# Altium PCB STM32_QFP100_DEVELOPMENT_BOARD.PcbDoc
Units mil, origin at the board's own origin, x right, y up, seen from the top; angles counter-clockwise.
Board outline 4600 x 2750 mil, 2 copper layers (Top Layer, Bottom Layer); 53 components, 105 nets, 334 pads, 20 vias.
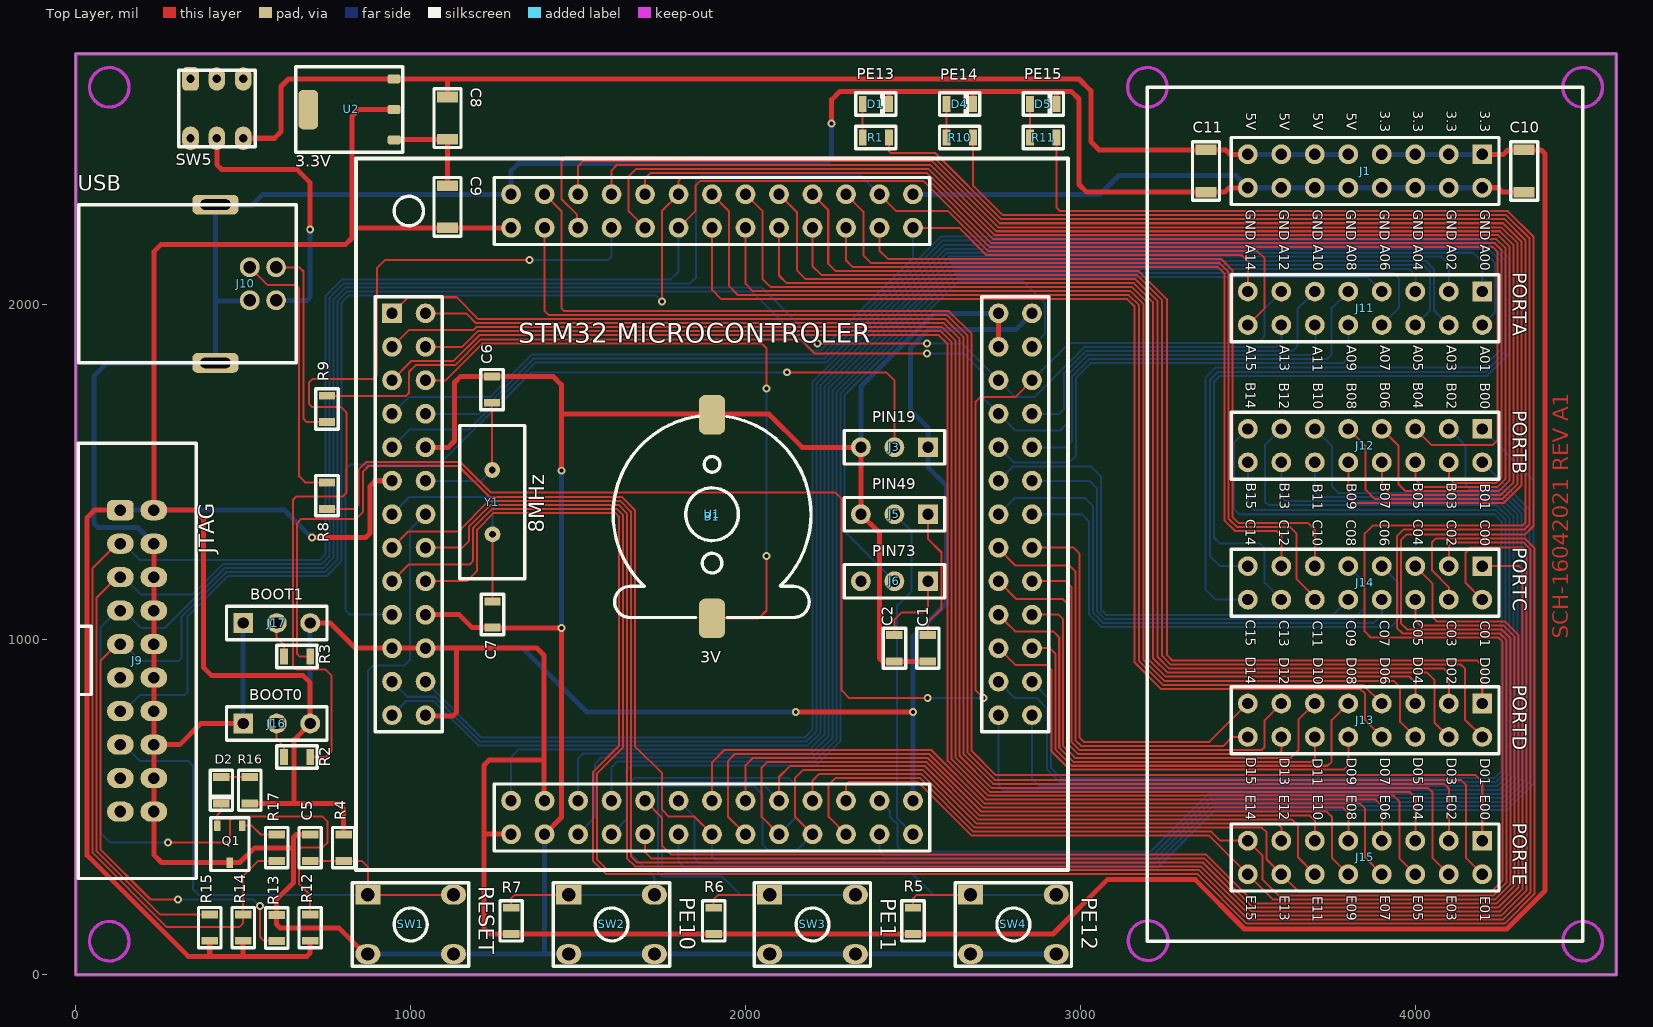
[diagram p0: Top Layer view]
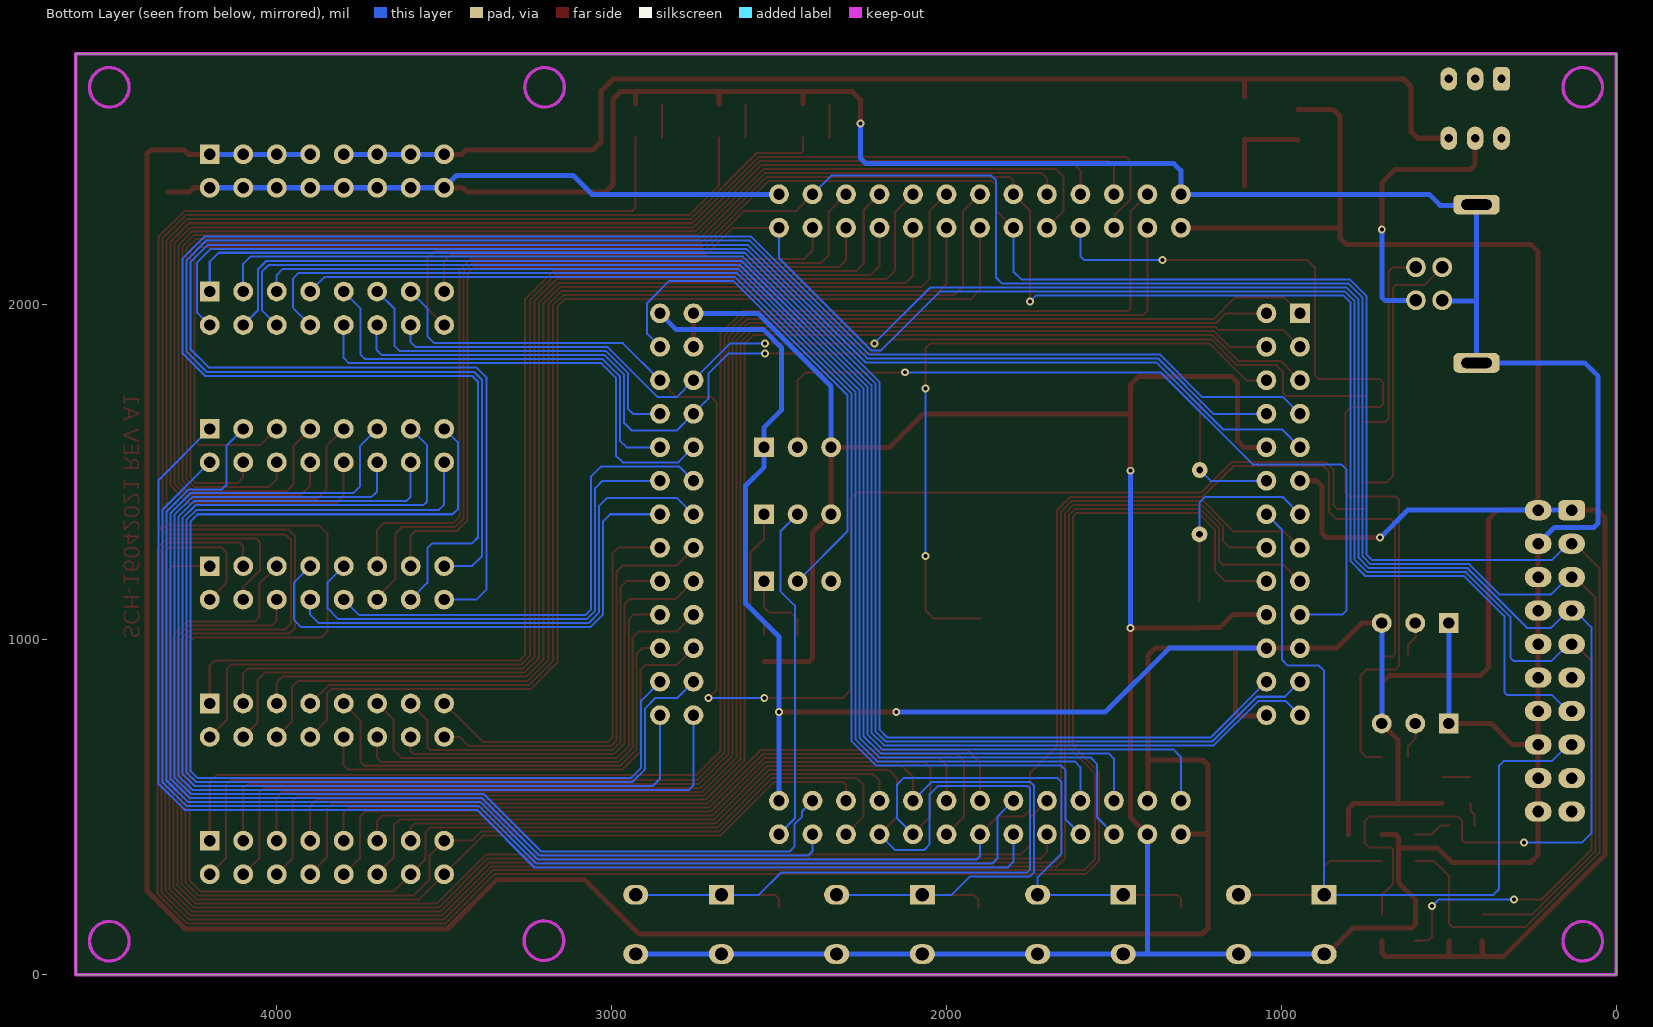
[diagram p1: Bottom Layer view, seen from below]

## Layer stack, top to bottom
Top Solder: solder mask 0.4, Solder Resist, Dk 3.5
Top Layer: signal copper 1.4
Dielectric 1: dielectric 12.6, FR-4, Dk 4.8
Bottom Layer: signal copper 1.4
Bottom Solder: solder mask 0.4, Solder Resist, Dk 3.5

## Board outline
0,0 4600,0 4600,2750 0,2750

## Design rules (kind name [scope] priority, off if disabled: settings)
Clearance [All] p1: gap=5.91 ignorepadtopadclearanceinfootprint=FALSE
PolygonConnect [All] p1: connectstyle=Relief reliefconductorwidth=10 reliefentries=4 polygonreliefangle="90 Angle" airgapwidth=10
RoutingPriority [OnLayer('Top Layer')] p1: routingpriority=0
RoutingVias [All] p1: holewidth=11.81 width=23.62 viastyle="Through Hole" minholewidth=11.81 minwidth=23.62 maxholewidth=11.81 maxwidth=23.62
SolderMaskExpansion [All] p1: expansion=4 istentingtop=FALSE
UnRoutedNet [All] p1: checkbadconnections=TRUE
Width [All] p1: maxlimit=15 minlimit=6 preferedwidth=6
28 further rules are at their usual default settings.

## Components (designator, comment, footprint, x,y, rotation, side; value= is the part's Value field where it differs from the comment)
B1 "3V" CR1220 1900,1375 r0 top
C1 "102pF" C0805 2544.48,974.99 r90 top
C2 "102pF" C0805 2444.48,974.99 r90 top
C5 "104P" C0805 699.99,379.38 r270 top
C6 "22p" C0805 1242.99,1747.38 r270 top
C7 "22p" C0805 1244.49,1075.62 r90 top
C8 "102pF" C1206 1110,2557.99 r90 top
C9 "102pF" C1206 1110,2292.99 r270 top
C10 "102pF" C1206 4325,2400 r90 top
C11 "102pF" C1206 3375,2400 r90 top
D1 "PE13" L0805RED 2389.37,2575.4 r0 top
D2 "LED0805" L0805RED 409.88,550.64 r270 top
D4 "PE14" L0805RED 2639.37,2575.4 r0 top
D5 "PE15" L0805RED 2889.37,2575.4 r0 top
J1 "POWER" "Header 8x2 TH Pitch 2.54mm" 3850,2400 r270 top
J3 "PIN19" "Header 3x1 TH Pitch 2.54mm" 2444.48,1574.99 r180 top
J5 "PIN49" "Header 3x1 TH Pitch 2.54mm" 2444.48,1374.99 r180 top
J6 "PIN73" "Header 3x1 TH Pitch 2.54mm" 2444.48,1174.99 r180 top
J9 "JTAG" IDC_CONNECTOR_20_2.54 183,937 r0 top
J10 "USB" USB-B-TYPE 558.73,2063.22 r0 top
J11 "PORTA" "Header 8x2 TH Pitch 2.54mm" 3850,1990.01 r270 top
J12 "PORTB" "Header 8x2 TH Pitch 2.54mm" 3850,1580 r270 top
J13 "PORTD" "Header 8x2 TH Pitch 2.54mm" 3850,760.01 r270 top
J14 "PORTC" "Header 8x2 TH Pitch 2.54mm" 3850,1170.01 r270 top
J15 "PORTE" "Header 8x2 TH Pitch 2.54mm" 3850,350 r270 top
J16 "BOOT0" "Header 3x1 TH Pitch 2.54mm" 600,750 r0 top
J17 "BOOT1" "Header 3x1 TH Pitch 2.54mm" 600,1050 r0 top
Q1 "2N3906" SOT23-3 460,390.01 r180 top
R1 "10k" R0805 2428.74,2500 r0 top
R2 "10k" R0805 700,650 r0 top
R3 "10k" R0805 700,950 r0 top
R4 "4K7" R0805 800,340 r270 top
R5 "4K7" R0805 2500,200 r90 top
R6 "4K7" R0805 1905,200 r90 top
R7 "4K7" R0805 1300,200 r90 top
R8 "4K7" R0805 750,1391.26 r270 top
R9 "4K7" R0805 750,1728.74 r90 top
R10 "10k" R0805 2678.74,2500 r0 top
R11 "10k" R0805 2928.74,2500 r0 top
R12 "10k" R0805 700,101.26 r270 top
R13 "10k" R0805 600,100 r270 top
R14 "10k" R0805 500,101.26 r270 top
R15 "10k" R0805 400,101.26 r270 top
R16 "1K" R0805 519.49,511.27 r270 top
R17 "4K7" R0805 600,340 r270 top
SW1 "RESET" BUTTON_HOLE_5.0mm 1000,150 r90 top
SW2 "PE10" BUTTON_HOLE_5.0mm 1600,150 r90 top
SW3 "PE11" BUTTON_HOLE_5.0mm 2200,150 r90 top
SW4 "PE12" BUTTON_HOLE_5.0mm 2800,150 r90 top
SW5 "SWITCH" "SWITCH 5.8x5.8 6 PINS" 421.26,2586.42 r0 top
U1 "STM32 MICROCONTROLER" SOCKET-ADAPTER-OTQ-100-05-12 1900,1375 r90 top
U2 "3.3V" SOT223-3 814.17,2583.46 r90 top
Y1 "8MHz" HC-49S 1243.48,1314.99 r90 top

## Footprints (in the part's own frame and the unit in brackets; to place one, negate y for a bottom-side part, rotate by r counter-clockwise, add the part's x,y. Pads: shape width x height; smd on the part's side, far side on the other; paste and mask are expansions set on the pad)
BUTTON_HOLE_5.0mm [mm]
  rect 1.5x1.9 hole 1: 1(2.25,3.25)
  oval 1.5x1.9 hole 1: 2(2.25,-3.25) 3(-2.25,3.25) 4(-2.25,-3.25)
  silkscreen extent -3.18,-4.4 3.18,4.42, body extent -3,-3.86 3,3.86, height 5
C0805 [mm]
  rect 0.6x1.24 smd: 1(-1,0) 2(1,0)
  silkscreen extent -1.52,-0.85 1.53,0.85, body extent -1,-0.6 1,0.6, height 1
C1206 [mm]
  rect 0.8x1.6 smd: 1(-1.6,0) 2(1.6,0)
  silkscreen extent -2.23,-1.02 2.22,1.02, body extent -1.6,-0.8 1.6,0.8, height 0.75
CR1220 [mm]
  rrect50% 2x3 smd: 1(0,-7.9) 2(0,7.55)
  silkscreen extent -7.5,-7.84 7.5,7.43, body extent -7.5,-9.42 7.5,9.07, height 4.04
HC-49S [mm]
  round 1.2 hole 0.5: 1(0,-0.025) 2(4.88,0)
  silkscreen extent -3.37,-2.47 8.25,2.45, body extent -3.24,-2.33 8.11,2.32, height 3.5
"Header 3x1 TH Pitch 2.54mm" [mm]
  rect 1.5x1.5 hole 0.85: 1(-2.54,0)
  round 1.5 hole 0.85: 2(0,0) 3(2.54,0)
  silkscreen extent -3.81,-1.27 3.81,1.27, body extent -3.81,-1.27 3.81,1.27, height 8.89
"Header 8x2 TH Pitch 2.54mm" [mm]
  rect 1.5x1.5 hole 0.85: 1(-1.27,8.89)
  round 1.5 hole 0.85: 2(1.27,8.89) 3(-1.27,6.35) 4(1.27,6.35) 5(-1.27,3.81) 6(1.27,3.81) 7(-1.27,1.27) 8(1.27,1.27) 9(-1.27,-1.27) 10(1.27,-1.27) 11(-1.27,-3.81) 12(1.27,-3.81) 13(-1.27,-6.35) 14(1.27,-6.35) 15(-1.27,-8.89) 16(1.27,-8.89)
  silkscreen extent -2.54,-10.16 2.54,10.16, body extent -2.54,-10.16 2.54,10.16, height 8.89
IDC_CONNECTOR_20_2.54 [mil]
  rrect50% 80x60 hole 35: 1(-50,450)
  oval 80x60 hole 35: 2(50,450) 3(-50,350) 4(50,350) 5(-50,250) 6(50,250) 7(-50,150) 8(50,150) 9(-50,50) 10(50,50) 11(-50,-50) 12(50,-50) 13(-50,-150) 14(50,-150) 15(-50,-250) 16(50,-250) 17(-50,-350) 18(50,-350) 19(-50,-450) 20(50,-450)
  silkscreen extent -175,-650 177,650, body extent -176,-654 174,654, height 354
L0805RED [mm]
  rect 0.6x1.24 smd: 1(-1,0.625) 2(1,0.625)
  silkscreen extent -1.53,-0.23 1.52,1.47, body extent -1,0 1,1.25, height 1.1
R0805 [mm]
  rect 0.6x1.24 smd: 1(-2,0) 2(0,0)
  silkscreen extent -2.53,-0.85 0.53,0.85, body extent -2,-0.62 0,0.62, height 0.45
SOCKET-ADAPTER-OTQ-100-05-12 [mm]
  rect 1.5x1.5 hole 0.85: 1(15.24,24.27)
  round 1.5 hole 0.85: 2(15.24,21.73) 3(12.7,24.27) 4(12.7,21.73) 5(10.16,24.27) 6(10.16,21.73) 7(7.62,24.27) 8(7.62,21.73) 9(5.08,24.27) 10(5.08,21.73) 11(2.54,24.27) 12(2.54,21.73) 13(0,24.27) 14(0,21.73) 15(-2.54,24.27) 16(-2.54,21.73) 17(-5.08,24.27) 18(-5.08,21.73) 19(-7.62,24.27) 20(-7.62,21.73) 21(-10.16,24.27) 22(-10.16,21.73) 23(-12.7,24.27) 24(-12.7,21.73) 25(-15.24,24.27) 26(-21.73,15.24) 27(-24.27,12.7) 28(-21.73,12.7) 29(-24.27,10.16) 30(-21.73,10.16) 31(-24.27,7.62) 32(-21.73,7.62) 33(-24.27,5.08) 34(-21.73,5.08) 35(-24.27,2.54) 36(-21.73,2.54) 37(-24.27,0) 38(-21.73,0) 39(-24.27,-2.54) 40(-21.73,-2.54) 41(-24.27,-5.08) 42(-21.73,-5.08) 43(-24.27,-7.62) 44(-21.73,-7.62) 45(-24.27,-10.16) 46(-21.73,-10.16) 47(-24.27,-12.7) 48(-21.73,-12.7) 49(-24.27,-15.24) 50(-21.73,-15.24) 51(-15.24,-24.27) 52(-15.24,-21.73) 53(-12.7,-24.27) 54(-12.7,-21.73) 55(-10.16,-24.27) 56(-10.16,-21.73) 57(-7.62,-24.27) 58(-7.62,-21.73) 59(-5.08,-24.27) 60(-5.08,-21.73) 61(-2.54,-24.27) 62(-2.54,-21.73) 63(0,-24.27) 64(0,-21.73) 65(2.54,-24.27) 66(2.54,-21.73) 67(5.08,-24.27) 68(5.08,-21.73) 69(7.62,-24.27) 70(7.62,-21.73) 71(10.16,-24.27) 72(10.16,-21.73) 73(12.7,-24.27) 74(12.7,-21.73) 75(15.24,-24.27) 76(21.73,-15.24) 77(24.27,-12.7) 78(21.73,-12.7) 79(24.27,-10.16) 80(21.73,-10.16) 81(24.27,-7.62) 82(21.73,-7.62) 83(24.27,-5.08) 84(21.73,-5.08) 85(24.27,-2.54) 86(21.73,-2.54) 87(24.27,0) 88(21.73,0) 89(24.27,2.54) 90(21.73,2.54) 91(24.27,5.08) 92(21.73,5.08) 93(24.27,7.62) 94(21.73,7.62) 95(24.27,10.16) 96(21.73,10.16) 97(24.27,12.7) 98(21.73,12.7) 99(24.27,15.24) 100(21.73,15.24) 101(-15.24,21.73) 102(-24.27,15.24) 103(15.24,-21.73) 104(24.27,-15.24)
  silkscreen extent -27,-27 27,27, body extent -25.54,-25.54 25.54,25.54, height 8.89
SOT23-3 [mm]
  rect 0.5x0.8 smd: 1(-0.95,-1.4) 2(0.95,-1.4) 3(0,1.4)
  silkscreen extent -1.45,-2 1.45,2, body extent -1.45,-1.4 1.45,1.4, height 1.3
SOT223-3 [mm]
  rrect50% 0.7x1 smd: 1(-2.3,-3.475) 2(0,-3.45) 3(2.325,-3.45)
  rrect50% 3x1.5 smd: 4(0,3.048)
  silkscreen extent -3.25,-4.11 3.25,3.99, body extent -3.25,-3.5 3.25,3.5, height 1.7
"SWITCH 5.8x5.8 6 PINS" [mm]
  rrect50% 1.27x1.778 hole 0.635: 1(-2,2.25)
  oval 1.27x1.778 hole 0.635: 2(0,2.25) 3(2,2.25) 4(2,-2.25) 5(0,-2.25) 6(-2,-2.25)
  silkscreen extent -2.9,-2.9 2.9,2.9, body extent -2.9,-2.9 2.9,2.9, height 10
USB-B-TYPE [mm]
  round 1.5 hole 0.95: 1(1,-1.25) 2(1,1.25) 3(-1,1.25) 4(-1,-1.25)
  rrect50% 3.5x1.5 hole 0.8 slot 2.3 at 0 deg: S1(-3.6,6) S2(-3.6,-6)
  silkscreen extent -13.97,-6 2.53,6, body extent -13.97,-7.42 2.53,7.37, height 11

## Part data
B1: library part Batery
C1 C2 C8 C9 C10 C11: library part Capacitors(SMD)
C5 C6 C7: library part C0805
D1 D4 D5: library part LED0805
J1 J11 J12 J13 J14 J15: library part "Header 8x2 TH Pitch 2.54mm"
J3 J5 J6 J16 J17: library part "Header 3x1 TH Pitch 2.54mm"
J9: library part IDC_2.54_10x2
J10: library part "USB B Type"
Q1: library part "2N3906 (SOT-23)"
R1 R2 R3 R4 R5 R6 R7 R8 R9 R10 R11 R16 R17: library part "Resistor SMD"
R12 R13 R14 R15: library part Resistors-SMD
SW1 SW2 SW3 SW4: library part "Button Hole"
SW5: library part SWITCH-DPDT
U1: library part SOCKET-ADAPTER-OTQ-100-05-12
U2: library part Ic-AMS1117(SOT-223)
Y1: library part Crystal

## Via types
v1: diameter 23.62, hole 11.81, Top Layer to Bottom Layer, tented both sides, 20 vias

## Nets (pads, with @x,y where several pads share a name; then routed paths per layer and width w, separated by ;. In a path a pad name is that pad's centre, name@x,y a point inside that pad or via, vN(x,y) a via of type N, cw(c..) or ccw(c..) an arc to the next point about the centre after c; other vN are vias at no path point)
+5: C8.2 C11.2 J1.9 J1.11 J1.13 J1.15 SW5.4 U2.3 | length 3688.7
  Top Layer w15: SW5.4 592.83,2497.83 612.5,2517.5 612.5,2652.5 635,2675 U2.3 1110,2675 ; C8.2 1110,2675 ; J1.15 3447,2450 3434,2463 3056,2463 3031,2488 3031,2640 2996,2675 1110,2675
  Bottom Layer w15: J1.15 J1.13 J1.11 J1.9
BOOT0: R2.2 U1.94 | length 2846.7
  Top Layer w6: R2.2 747,650 763,666 763,894 745.1,911.9 659.1,911.9 649,922 649,1419 658,1428 797,1428 808,1439 808,1679.5 792.5,1695 706,1695 696,1705 696,1768 707,1779 889,1779 900,1790 900,2111 923,2134 v1(1355,2134)
  Bottom Layer w6: v1(1355,2134) 1588,2134 1600,2146 U1.94
GND: B1.2 C1.1 C2.1 C5.1 C6.1 C7.1 C10.1 C11.1 D1.2 D4.2 D5.2 J1.2 J1.4 J1.6 J1.8 J1.10 J1.12 J1.14 J1.16 J3.3 J5.3 J9.4 J9.6 J9.8 J9.10 J9.12 J9.14 J9.16 J9.18 J9.20 J10.4 J10.S1 J10.S2 J16.1 J17.1 Q1.3 R13.1 SW1.3 SW1.4 SW2.3 SW2.4 SW3.3 SW3.4 SW4.3 SW4.4 U1.10 U1.20 U1.27 U1.74 U1.99 U1.103 U1.104 | length 17175.2
  Top Layer w15: J9.4 J9.6 J9.8 J9.10 J9.12 J9.14 J9.16 ; J16.1 373,750 310,687 J9.16 ; 649.7,379 534,379 489.89,334.89 Q1.3 256.11,334.89 233,358 J9.20 J9.18 J9.16 ; C5.1 658.79,418.74 650,409.95 650,275 600,225 R13.1 600,150 611,139 786.59,139 864.17,61.42 SW1.3 ; U1.20 1145,1075 1183.75,1036.25 C7.1 1245.11,1035.63 1449.37,1035.63 v1(1450,1035) 1450,469.49 U1.27 ; U1.10 1112.5,1575 1131,1593.5 1131,1768.5 1149.24,1786.74 C6.1 1425,1786.74 1450,1761.74 1450,1675 ; SW1.4@1120.08,61.42 SW1.4 ; v1(1450,1505) 1450,1675 ; v1(2257,2542) 2257,2613.08 2282,2638.08 2427,2638.08 ; D1.2 2428.74,2636.34 2427,2638.08 ; C1.1 C2.1 2408.37,935.63 2400,944 2400,1319.48 J5.3 J3.3 2169.01,1574.99 2070,1674 1900,1674 1451,1674 1450,1675 ; D4.2 2678.74,2637.28 2679.54,2638.08 ; U1.74 U1.103 ; D5.2 2928.74,2634.34 ; J1.16 3499.76,2349.76 3443.75,2349.76 3431,2337.01 C11.1 3018.99,2337.01 2996,2360 2996,2615 2972.92,2638.08 2679.54,2638.08 ; J1.2 4247.99,2350.01 4260.99,2337.01 C10.1 ; 2427,2638.08 2679.54,2638.08
  Bottom Layer w15: J9.4 184.01,1336 66,1336 54,1348 54,1787 94,1827 J10.S2 J10.S1 ; 418,2012.01 J10.4@527.36,2012.01 ; J10.S1@430.31,2292.13 425,2297.44 525.44,2297.44 558.51,2330.51 U1.99 1300.01,2401.01 1321,2422 2240,2422 2257,2439 v1(2257,2542) ; J16.1 J17.1 ; SW1.3 SW1.4 1400,61.42 ; U1.27 1400,61.42 ; v1(1450,1035) v1(1450,1505) ; J3.3 2344.48,1756.48 2562.99,1974.99 U1.103 ; U1.104 3058.52,2330.52 3115,2387 3463,2387 J1.16 J1.2 ; SW4.4 SW4.3 SW3.4 SW3.3 SW2.4 SW2.3 1400,61.42
JNRST: J9.3 J12.5 R14.1 R17.2 U1.90 | length 7865.4
  Top Layer w6: J9.3 123,1287 50.5,1214.5 50.5,363.5 272,142 488,142 500,154 R14.1 500,295 545,340 R17.2 ; U1.90 1851,2281.51 1851,2356.25 1865.32,2370.57 2531.27,2370.57 2729.36,2172.47 4232.53,2172.47 4245,2160 4245,1595 4232,1582 4048,1582 J12.5
  Bottom Layer w6: J9.3 143,1287 192.01,1238 729,1238 745.47,1254.47 745.47,2025.82 795.84,2076.19 1776.19,2076.19 1800,2100 U1.90
JTCK: J9.9 J11.15 R13.2 U1.76 | length 6128.3
  Top Layer w6: J9.9 123,987 74.31,938.31 74.31,373.36 223.15,224.52 v1(305,224.52) ; v1(550,205) 550,113.54 561.77,101.77 598.23,101.77 R13.2 R13.2@587.4,100 ; U1.76 2637.65,2230.52 2719.5,2148.66 3482.34,2148.66 3500,2131 J11.15
  Bottom Layer w6: J9.9 143,987 193.01,937 307,937 316.09,946.09 316.09,1069.42 448.96,1202.28 743.79,1202.28 781.19,1239.68 781.19,2011.03 810.64,2040.47 2018.81,2040.47 2195,1864.28 2225.28,1864.28 2499.99,2138.99 U1.76 ; v1(305,224.52) 530.48,224.52 v1(550,205)
JTDI: J9.5 J11.16 R15.1 U1.77 | length 6168.9
  Top Layer w6: J9.5 123,1187 62.41,1126.41 62.41,368.43 250.84,180 R15.1 ; U1.77 2450.51,2280 2605,2280 2724.43,2160.57 3528.43,2160.57 3550,2139 3550,1990.01 J11.16
  Bottom Layer w6: J9.5 143,1187 194.01,1136 349,1136 439.09,1226.09 733.93,1226.09 757.38,1249.54 757.38,1963.89 757.38,2020.89 800.77,2064.28 857.77,2064.28 1834.28,2064.28 1852,2082 1852,2372 1866,2386 2344.51,2386 U1.77
JTDO: J9.13 J12.4 U1.89 | length 6553.5
  Top Layer w6: v1(1750,2010) 1750,2280.51 U1.89 1800,2371 1811.47,2382.47 2536.2,2382.47 2734.3,2184.38 4237.46,2184.38 4257.76,2164.08 4257.76,1485.92 4239.93,1468.09 4116.91,1468.09 4100,1485 J12.4
  Bottom Layer w6: J9.13 143,787 191,835 325,835 334,844 334,1070.49 453.89,1190.38 748.73,1190.38 793.09,1234.75 793.09,2006.09 815.57,2028.57 1731.43,2028.57 v1(1750,2010)
JTMS: J9.7 J11.14 R12.1 U1.72 | length 6436.1
  Top Layer w6: v1(275,395) 453,395 461,403 461,461 473,473 736,473 751,458 751,394 737,380 673.91,380 666.41,372.5 666.41,271.59 700,238 R12.1 ; v1(2215,1885) v1(2542.3,1885)
  Bottom Layer w6: v1(275,395) 102,395 73.49,423.51 73.49,428.49 74,429 74,1038 123,1087 J9.7 143,1087 195.01,1035 264.84,1035 444.03,1214.19 738.86,1214.19 769.28,1244.61 769.28,1958.96 769.28,2015.96 805.7,2052.38 862.7,2052.38 2047.62,2052.38 v1(2215,1885) ; v1(2542.3,1885) 2645.51,1885 U1.72 2805.51,1725 2862,1725 3011.09,1874.09 3585.09,1874.09 3600,1889 J11.14
NetB1_1: B1.1 U1.6 | length 2022.6
  Top Layer w6: U1.6 1104.35,1775 1214.63,1885.28 2047.72,1885.28 2062.5,1870.5 v1(2062.5,1750) ; B1.1 2038.98,1063.98 2062.5,1087.5 v1(2062.5,1250)
  Bottom Layer w6: v1@2062.5,1252.5 v1(2062.5,1750)
NetC1_2: C1.2 J5.1 | length 394.4
  Top Layer w6: C1.2 2544.47,1052.47 2585.19,1093.19 2585.19,1260.81 2544.48,1301.52 J5.1
NetC2_2: C2.2 J6.1 | length 239.5
  Top Layer w6: C2.2 2444.47,1060.47 2466,1082 2530,1082 2544.48,1096.48 J6.1
NetC8_1: C8.1 C9.1 U2.1 | length 298.5
  Top Layer w15: U2.1 952.03,2493.96 C8.1@1110,2493.96 ; C9.1 C8.1@1110,2493.96 ; C8.1 C8.1@1110,2493.96
NetD1_1: D1.1 R1.1 | length 100
  Top Layer w6: R1.1 D1.1
NetD2_1: D2.1 R16.1 | length 85
  Top Layer w6: D2.1 R16.1
NetD2_2: D2.2 Q1.2 | length 71.1
  Top Layer w6: Q1.2 422.6,476.88 434.49,488.76 D2.2
NetD4_1: D4.1 R10.1 | length 100
  Top Layer w6: R10.1 D4.1
NetD5_1: D5.1 R11.1 | length 100
  Top Layer w6: R11.1 D5.1
NetJ10_1: J10.1 SW5.5 | length 827.7
  Top Layer w15: SW5.5 421.26,2418.74 435,2405 660,2405 700,2365 v1(700,2225)
  Bottom Layer w15: J10.1 691.01,2014.01 700,2023 v1(700,2225)
NetJ10_2: J10.2 R9.1 | length 601.2
  Top Layer w6: J10.2 667.57,2112.43 680,2100 680,1660 690,1650 R9.1
NetJ10_3: J10.3 R8.1 | length 826
  Top Layer w6: J10.3 571.8,2060 657.16,2060 667.16,2050 667.16,1487.84 685,1470 R8.1
NetJ16_2: J16.2 R2.1 | length 108.8
  Top Layer w6: J16.2 600,704 621.26,682.74 R2.1
NetJ17_2: J17.2 R3.1 | length 108.8
  Top Layer w6: J17.2 600,1007 621.26,985.74 R3.1
NetQ1_1: Q1.1 R17.1 | length 113.5
  Top Layer w6: Q1.1 525.87,445.13 552.26,418.74 R17.1
nRST: C5.2 J9.15 R4.2 SW1.1 SW1.2 U1.14 | length 2921.7
  Top Layer w6: C5.2 R4.2 854,340 872.05,321.95 SW1.1 SW1.2
  Bottom Layer w6: J9.15 143,687 192.01,638 336,638 350,624 350,255.58 367,238.58 SW1.1 872.05,907.05 889,924 982,924 998,940 998,1328.51 U1.14
OSC0: C6.2 U1.12 Y1.2 | length 413.4
  Top Layer w6: C6.2 1243.48,1707.52 Y1.2
  Bottom Layer w6: U1.12 1211.36,1475 Y1.2
OSC1: C7.2 U1.13 Y1.1 | length 623.3
  Top Layer w6: C7.2 Y1.1
  Bottom Layer w6: U1.13 996.49,1427 1227,1427 1244.48,1409.52 Y1.1
PA0: J11.1 U1.23 | length 4642.2
  Bottom Layer w6: U1.23 989.51,830 1072.67,830 1206.24,696.43 2181.41,696.43 2212.57,727.59 2212.57,1765.63 2602.85,2155.91 4173.09,2155.91 4199.99,2129.01 J11.1
PA1: J11.2 U1.24 | length 4695.1
  Bottom Layer w6: U1.24 1211.17,708.34 2176.48,708.34 2200.66,732.52 2200.66,1770.56 2597.91,2167.81 4197.19,2167.81 4238.43,2126.57 4238.43,1978.45 J11.2
PA2: J11.3 U1.25 | length 4532.9
  Bottom Layer w6: U1.25 987.48,818 1067.83,818 1201.3,684.53 2186.34,684.53 2224.47,722.66 2224.47,1760.69 2607.78,2144 4079,2144 4100,2123 J11.3
PA3: J11.4 U1.26 | length 4303.4
  Bottom Layer w6: U1.26 1300.01,650.01 1322.62,672.62 2191.27,672.62 2236.38,717.73 2236.38,1755.76 2611.9,2131.28 4031.72,2131.28 4056,2107 4056,1984.01 J11.4
PA4: J11.5 U1.29 | length 3957.3
  Bottom Layer w6: U1.29 1550,469.49 1550,629 1569.81,648.81 2201.14,648.81 2260.19,707.86 2260.19,1745.9 2621.76,2107.47 3981.53,2107.47 4000,2089 J11.5
PA5: J11.6 U1.30 | length 4074
  Bottom Layer w6: U1.30 1500,645 1515.72,660.72 2196.21,660.72 2248.28,712.79 2248.28,1750.83 2616.83,2119.38 4023.62,2119.38 4044.09,2098.91 4044.09,1984.1 J11.6
PA6: J11.7 U1.31 | length 3701.3
  Bottom Layer w6: U1.31 1644,463.49 1644,610 1659,625 2211,625 2284,698 2284,876.14 2284,1130.14 2284,1736.04 2631.62,2083.66 3856.34,2083.66 J11.7
PA7: J11.8 U1.32 | length 3838.6
  Bottom Layer w6: U1.32 1600,620 1616.91,636.91 2206.07,636.91 2272.09,702.93 2272.09,1740.97 2626.69,2095.57 3934.43,2095.57 3952,2078 3952,1992.01 J11.8
PA8: J11.9 U1.67 | length 1330.1
  Bottom Layer w6: U1.67 2955,1575 2975.09,1595.09 2975.09,1787.58 3025.89,1838.38 3735.38,1838.38 3750,1853 3750,1990.01 J11.9
PA9: J11.10 U1.68 | length 1426.7
  Bottom Layer w6: U1.68 2800.51,1530 2967,1530 2987,1550 2987,1782.65 3030.82,1826.47 3784.47,1826.47 3800,1842 J11.10
PA10: J11.11 U1.69 | length 1123.5
  Bottom Layer w6: U1.69 2936,1675 2951.28,1690.28 2951.28,1797.45 3016.03,1862.19 3633.19,1862.19 3648,1877 3648,1988.01 J11.11
PA11: J11.12 R9.2 U1.70 | length 3474.2
  Top Layer w6: R9.2 986.74,1728.74 995,1737 995,1800 1015,1820 1132.51,1820 1209.7,1897.19 2164.81,1897.19 2207,1855 2541.52,1855 v1(2541.99,1855.47)
  Bottom Layer w6: v1(2541.99,1855.47) 2649.53,1855.47 2711,1794 2711,1719.51 U1.70 2805.51,1625 2939.19,1625 2963.19,1649 2963.19,1792.52 3020.96,1850.28 3686.28,1850.28 3702,1866 3702,1938.01 J11.12
PA12: J11.13 R8.2 U1.71 | length 4699.4
  Top Layer w6: R8.2 833,1391.26 844,1402.26 844,1508 867,1531 1147.84,1531 1238.84,1440 2268,1440 2287,1421 2287,849 2310,826 v1(2544,826) ; v1(2710,826) 2687,849 2687,1711 2701,1725 2805.51,1725 U1.71
  Bottom Layer w6: v1(2544,826) v1(2710,826) ; U1.71 2966.51,1886 3529.16,1886 3550,1906.84 3550,1990.01 J11.13
PB0: J12.1 U1.35 | length 3869.3
  Bottom Layer w6: U1.35 1800,337 1816.81,320.19 3230.19,320.19 3402,492 4275,492 4353,570 4353,1477 J12.1
PB1: J12.2 U1.36 | length 3805.7
  Bottom Layer w6: U1.36 1848,471.49 1848,347 1862.91,332.09 3225.26,332.09 3397.07,503.91 4270.07,503.91 4341.09,574.93 4341.09,1388.91 J12.2
PB2: J12.3 R3.2 U1.37 | length 6546.4
  Top Layer w6: R3.2 669,950 660.91,958.09 660.91,1348.91 673.41,1361.41 837.41,1361.41 857,1381 857,1502 874.09,1519.09 1142.91,1519.09 1235.38,1426.62 1614.47,1426.62 1630.73,1426.62 1669.62,1387.73 1669.62,1371.47 1669.62,682.38 1751,601 1751,492 1771,472 1847.49,472 U1.37
  Bottom Layer w6: U1.37 1900,353 1909,344 3220.33,344 3392.14,515.81 4265.14,515.81 4329.19,579.86 4329.19,1382.81 4262.38,1449.62 4163.38,1449.62 4150,1463 4150,1580 J12.3
PB5: J12.6 U1.91 | length 3745.1
  Top Layer w6: U1.91 1700,2378 1716.38,2394.38 2541.13,2394.38 2739.23,2196.28 4242.39,2196.28 4269.66,2169.01 4269.66,1480.99 4244.86,1456.19 4023.81,1456.19 4000,1480 J12.6
PB6: J12.7 U1.92 | length 4146.7
  Top Layer w6: U1.92 1651,2279.51 1651,2384 1673.28,2406.28 2546.06,2406.28 2744.16,2208.19 4247.32,2208.19 4281.57,2173.94 4281.57,1512.08 4281.57,1476.06 4249.79,1444.28 3970.72,1444.28 3950,1465 3950,1580 J12.7
PB7: J12.8 U1.93 | length 4069.5
  Top Layer w6: U1.93 1600,2402 1616.19,2418.19 2551,2418.19 2749.09,2220.09 4252.25,2220.09 4293.47,2178.88 4293.47,1507.15 4293.47,1471.12 4254.73,1432.38 3927.62,1432.38 3900,1460 J12.8
PB8: J12.9 U1.95 | length 4403
  Top Layer w6: U1.95 1500,2415 1515.09,2430.09 2555.93,2430.09 2754.02,2232 4257.18,2232 4305.38,2183.81 4305.38,1502.21 4305.38,1466.19 4259.66,1420.47 3879.53,1420.47 3852,1448 3852,1578 J12.9
PB9: J12.10 U1.96 | length 4570.8
  Top Layer w6: U1.96 1496.96,2233.55 1496.96,2269.04 1451,2315 1451,2429 1464,2442 2560.86,2442 2758.86,2244 4262.02,2244 4317.28,2188.74 4317.28,1497.28 4317.28,1461.26 4264.59,1408.57 3821.43,1408.57 3800,1430 J12.10
PB10: J12.11 U1.47 | length 3654.3
  Bottom Layer w6: U1.47 2399.99,368.01 2412.09,355.91 3215.39,355.91 3387.21,527.72 4260.21,527.72 4317.28,584.79 4317.28,1377.88 4257.45,1437.72 3771.28,1437.72 3751,1458 3751,1579 J12.11
PB11: J12.12 U1.48 | length 3613.5
  Bottom Layer w6: U1.48 2432.07,487.41 2432.07,470.57 2454,448.64 2454,382.32 2468.51,367.81 3210.46,367.81 3382.27,539.62 4255.27,539.62 4305.38,589.73 4305.38,1372.95 4252.52,1425.81 3717.19,1425.81 3700,1443 J12.12
PB12: J12.13 U1.51 | length 3392.3
  Bottom Layer w6: U1.51 2855.52,584.48 2876.57,563.43 4245.41,563.43 4281.57,599.59 4281.57,1363.09 4242.65,1402 3562,1402 3551,1413 3551,1581 J12.13
PB13: J12.14 U1.52 | length 3365.4
  Bottom Layer w6: U1.52 2755.52,565.48 2769.47,551.53 4250.34,551.53 4293.47,594.66 4293.47,1368.02 4247.58,1413.91 3613.09,1413.91 3600,1427 J12.14
PB14: J12.15 U1.53 | length 3463.1
  Bottom Layer w6: U1.53 2912.01,818.51 2912.01,617.99 2942.76,587.24 4235.55,587.24 4257.76,609.45 4257.76,1353.22 4235.98,1375 3475,1375 3458,1392 3458,1588 J12.15
PB15: J12.16 U1.54 | length 3425.3
  Bottom Layer w6: U1.54 2804.31,826.2 2869,826.2 2900.1,795.1 2900.1,613.06 2937.82,575.34 4240.48,575.34 4269.66,604.52 4269.66,1358.15 4239.44,1388.38 3515.62,1388.38 3500,1404 J12.16
PC0: J14.1 U1.15 | length 5651.1
  Top Layer w6: U1.15 993.49,1324 1142.98,1324 1233.69,1414.72 1607.79,1414.72 1625.79,1414.72 1657.72,1382.79 1657.72,1364.79 1657.72,353.28 1675.28,335.72 3364.61,335.72 3511.85,188.47 4251.96,188.47 4320.39,256.9 4320.39,1210.61 4310.99,1220.01 J14.1
PC1: J14.2 U1.16 | length 5873.9
  Top Layer w6: U1.16 1154,1275 1174,1295 1174,1338.19 1238.63,1402.81 1602.86,1402.81 1620.86,1402.81 1645.81,1377.86 1645.81,1359.86 1645.81,348.35 1670.35,323.81 3359.68,323.81 3506.92,176.57 4256.89,176.57 4332.29,251.97 4332.29,1263.71 4321,1275 4165,1275 4150,1260 4150,1170.01 J14.2
PC2: J14.3 U1.17 | length 6140.2
  Top Layer w6: U1.17 994.49,1225 1176,1225 1186.84,1235.84 1186.84,1334.19 1243.56,1390.91 1597.93,1390.91 1615.93,1390.91 1633.91,1372.93 1633.91,1354.93 1633.91,678.07 1556,600.16 1556,345 1589.09,311.91 3354.75,311.91 3501.99,164.66 4261.82,164.66 4344.2,247.03 4344.2,1268.64 4321.84,1291 4112,1291 4100,1279 J14.3
PC3: J14.4 U1.18 | length 6272.7
  Top Layer w6: U1.18 1168,1175 1198.74,1205.74 1198.74,1329.26 1248.49,1379 1611,1379 1622,1368 1622,683 1544.09,605.09 1544.09,340.07 1584.16,300 3349.82,300 3497.06,152.76 4266.76,152.76 4356.1,242.1 4356.1,1273.57 4326.67,1303 4061,1303 4050,1292 4050,1207.52 4100,1157.52 J14.4
PC4: J14.5 U1.33 | length 3961.1
  Top Layer w6: U1.33 1700,366 1718.38,347.62 3369.54,347.62 3516.79,200.38 4247.03,200.38 4308.48,261.83 4308.48,1013.87 4267.16,1055.19 4063.81,1055.19 4052,1067 4052,1168.01 J14.5
PC5: J14.6 U1.34 | length 3916.8
  Top Layer w6: U1.34 1750,469.49 1750,386.32 1776.8,359.53 3374.47,359.53 3521.72,212.28 4242.1,212.28 4296.57,266.76 4296.57,1008.94 4262.23,1043.28 4013.72,1043.28 4000,1057 J14.6
PC6: J14.7 U1.63 | length 1584.9
  Bottom Layer w6: U1.63 3004,1375 3025.28,1353.72 3025.28,1205.12 3025.09,1204.93 3025.09,1076.91 3064,1038 3927,1038 3949,1060 3949,1171.01 J14.7
PC7: J14.8 U1.64 | length 1560.8
  Bottom Layer w6: U1.64 2803.51,1423 3014,1423 3037.19,1399.81 3037.19,1200.19 3037,1200 3037,1081.84 3068.93,1049.91 3874.91,1049.91 3900,1075 J14.8
PC8: J14.9 U1.65 | length 1537.6
  Bottom Layer w6: U1.65 3027.09,1475 3049.09,1453 3049.09,1086.58 3073.86,1061.81 3816,1061.81 3848,1093.81 3848,1172.01 J14.9
PC9: J14.10 U1.66 | length 1497.8
  Bottom Layer w6: U1.66 2798.61,1518.09 3030.91,1518.09 3061,1488 3061,1091.51 3078.79,1073.72 3753.71,1073.72 J14.10
PC10: J14.11 U1.78 | length 2253.9
  Top Layer w6: U1.78 2400,2162.5 2425.74,2136.76 3421.24,2136.76 3454,2104 3454,1395 3454,1367.17 3471.67,1349.5 3679.5,1349.5 3700,1329 J14.11
PC11: J14.12 U1.79 | length 2493.2
  Top Layer w6: U1.79 2352,2278.51 2352,2148 2375.15,2124.85 3416.31,2124.85 3442.09,2099.07 3442.09,1362.24 3468.1,1336.24 3626.76,1336.24 3646,1317 3646,1181 3700,1127 J14.12
PC12: J14.13 U1.80 | length 2260.7
  Top Layer w6: U1.80 2300,2133 2320.05,2112.95 3411.38,2112.95 3430.19,2094.14 3430.19,1357.31 3463.17,1324.33 3586.83,1324.33 3600,1311.16 J14.13
PC13: J14.14 U1.7 | length 5588.2
  Bottom Layer w6: U1.7 994.49,1725 1236,1725 1363.38,1852.38 2231.97,1852.38 2584.5,2204.91 4214.61,2204.91 4282,2137.51 4282,1856.59 4213.28,1787.87 3415.51,1787.87 3398.91,1771.27 3398.91,1305.66 3416.56,1288 3535,1288 3550,1273 3550,1170.01 J14.14
PC14: J14.15 U1.8 | length 5306.3
  Bottom Layer w6: U1.8 1202.84,1675 1368.31,1840.47 2236.9,1840.47 2589.43,2193 4209.67,2193 4270.09,2132.58 4270.09,1861.52 4208.35,1799.78 3410.58,1799.78 3387,1776.2 3387,1250 3416.99,1220.01 J14.15
PC15: J14.16 U1.9 | length 5536.7
  Bottom Layer w6: U1.9 997.49,1628 1173,1628 1373.57,1828.57 2241.83,1828.57 2592.98,2179.72 4206.12,2179.72 4258.19,2127.65 4258.19,1868.55 4203.42,1813.78 3404.78,1813.78 3373,1782 3373,1151 3403.99,1120.01 J14.16
PD0: J13.1 U1.81 | length 3412.7
  Top Layer w6: U1.81 2247,2283.51 2247,2123 2269.13,2100.87 3174.48,2100.87 3258,2017.34 3258,954.86 3274.99,937.86 4185.64,937.86 4199.99,923.51 J13.1
PD1: J13.2 U1.82 | length 3408.6
  Top Layer w6: U1.82 2200,2116 2227.04,2088.96 3169.54,2088.96 3244.22,2014.29 3244.22,951.8 3270.06,925.96 4136.54,925.96 4148,914.5 4148,762.01 J13.2
PD2: J13.3 U1.83 | length 3406.6
  Top Layer w6: U1.83 2153,2277.51 2153,2104 2179.94,2077.06 3164.61,2077.06 3230.44,2011.23 3230.44,948.74 3265.13,914.05 4085.95,914.05 4100,900 J13.3
PD3: J13.4 U1.84 | length 3410.4
  Top Layer w6: U1.84 2100,2088 2122.85,2065.15 3159.68,2065.15 3216.66,2008.17 3216.66,945.69 3260.2,902.15 4035.35,902.15 4057,880.5 4057,753.01 J13.4
PD4: J13.5 U1.85 | length 3407.7
  Top Layer w6: U1.85 2051,2279.51 2051,2077 2074.75,2053.25 3154.75,2053.25 3202.88,2005.11 3202.88,942.63 3255.27,890.24 3982.76,890.24 4000,873 J13.5
PD5: J13.6 U1.86 | length 3411.3
  Top Layer w6: U1.86 2000,2063 2021.66,2041.34 3149.82,2041.34 3189.1,2002.06 3189.1,939.57 3251.86,876.81 3937.19,876.81 3955,859 3955,755.01 J13.6
PD6: J13.7 U1.87 | length 3383.1
  Top Layer w6: U1.87 1950,2280.51 1950,2057 1977.56,2029.44 3144.89,2029.44 3175.32,1999 3175.32,936.51 3246.93,864.91 3845.1,864.91 J13.7
PD7: J13.8 U1.88 | length 3407.1
  Top Layer w6: U1.88 1900,2045 1927.47,2017.53 3139.96,2017.53 3161.54,1995.94 3161.54,933.46 3242,853 3836,853 3850,839 3850,760.01 J13.8
PD8: J13.9 U1.55 | length 1407.2
  Top Layer w6: U1.55 2908.98,975 2924.91,959.07 2924.91,672.93 2973.89,623.95 3737.95,623.95 3750.08,636.08 3750.08,760.08 J13.9
PD9: J13.10 U1.56 | length 1427
  Top Layer w6: U1.56 2805.51,925 2899,925 2913,911 2913,668 2968.95,612.05 3786.05,612.05 3800,626 J13.10
PD10: J13.11 U1.57 | length 1363.7
  Top Layer w6: U1.57 2935,1075 2948.72,1061.28 2948.72,682.79 2981.27,650.24 2983.75,647.76 3628.76,647.76 3651,670 3651,761.01 J13.11
PD11: J13.12 U1.58 | length 1390.5
  Top Layer w6: U1.58 2762,1075 U1.58@2773,1064 ; U1.58@2772.84,1063.84 2772.84,1057.67 2805.17,1025.34 2918.47,1025.34 2936.81,1007 2936.81,677.86 2978.82,635.86 3688.86,635.86 3700,647 J13.12
PD12: J13.13 U1.59 | length 1328
  Top Layer w6: U1.59 2956,1175 2972.91,1158.09 2972.91,695.79 2997.13,671.57 3541.57,671.57 3550,680 3550,760.01 J13.13
PD13: J13.14 U1.60 | length 1347.8
  Top Layer w6: U1.60 2756,1175 2809,1122 2947,1122 2961,1108 2961,690.86 2992.2,659.67 3591.67,659.67 3600,668 J13.14
PD14: J13.15 U1.61 | length 1253.7
  Top Layer w6: U1.61 2980,1275 2996.72,1258.28 2996.72,709.17 3010.5,695.38 3385.38,695.38 J13.15
PD15: J13.16 U1.62 | length 1297.5
  Top Layer w6: U1.62 2755.51,1271.49 2805,1222 2967,1222 2984.81,1204.19 2984.81,700.73 2998.79,686.75 3002.06,683.48 3427.53,683.48 3454.06,710.01 J13.16
PE0: J15.1 U1.97 | length 4602.2
  Top Layer w6: U1.97 1450,2280.52 1450,1990.45 1459,1981.45 2607.06,1981.45 2675.09,1913.42 2675.09,667.91 2747,596 4180,596 4199.99,576.01 J15.1
PE1: J15.2 U1.98 | length 4602.8
  Top Layer w6: U1.98 1400.01,1981.53 1412,1969.54 2602.13,1969.54 2663.19,1908.48 2663.19,662.97 2744.16,582 4136,582 4151,567 4151,349 J15.2
PE2: J15.3 U1.1 | length 4668.7
  Top Layer w6: U1.1 992.49,2023 1137,2023 1202.37,1957.63 2597.2,1957.63 2649.83,1905.01 2651.28,1903.55 2651.28,658.04 2739.23,570.09 4085.91,570.09 4100,556 J15.3
PE3: J15.4 U1.2 | length 4593.7
  Top Layer w6: U1.2 1165.74,1974.99 1195,1945.73 2592.27,1945.73 2639.38,1898.62 2639.38,653.11 2734.3,558.19 4037.81,558.19 4052,544 4052,348 J15.4
PE4: J15.5 U1.3 | length 4520.4
  Top Layer w6: U1.3 994.49,1925 1187,1925 1195.82,1933.82 2587.34,1933.82 2627.47,1893.69 2627.47,648.18 2729.37,546.28 3982.72,546.28 4000,529 J15.5
PE5: J15.6 U1.4 | length 4476.2
  Top Layer w6: U1.4 1153.84,1875 1200.76,1921.92 2582.41,1921.92 2615.57,1888.76 2615.57,643.25 2724.44,534.38 3936,534.38 3953.43,516.95 3953.43,346.57 J15.6
PE6: J15.7 U1.5 | length 4427.9
  Top Layer w6: U1.5 944.49,1775.32 1001.07,1831.91 1127.58,1831.91 1205.59,1909.92 2577.19,1909.92 2603.66,1883.45 2603.66,638.32 2719.51,522.47 3882.53,522.47 3900,505 J15.7
PE7: J15.8 U1.38 | length 2369
  Top Layer w6: U1.38 1900,634 1937,671 2554.14,671 2714.57,510.57 3835.43,510.57 3850,496 3850,350 J15.8
PE8: J15.9 U1.39 | length 2258.7
  Top Layer w6: U1.39 1947,472.49 1947,638 1968.09,659.09 2549.21,659.09 2709.64,498.66 3785.34,498.66 3800,484 J15.9
PE9: J15.10 U1.40 | length 2131.2
  Top Layer w6: U1.40 2000,626 2021.19,647.19 2544.28,647.19 2704.71,486.76 3736.24,486.76 3752,471 3752,348 J15.10
PE10: J15.11 R7.2 SW2.1 SW2.2 U1.41 | length 3511.1
  Top Layer w6: R7.2 1300,228 1310.58,238.58 SW2.1 ; U1.41 2048,471.49 2048,618 2065.28,635.28 2539.35,635.28 2699.78,474.85 3685.15,474.85 3700,460 J15.11
  Bottom Layer w6: SW2.1 SW2.2 1727.95,291.05 1655.91,363.09 1655.91,574.91 1669,588 2127,588 2147,568 2147,466.49 U1.41
PE11: J15.12 R6.2 SW3.1 SW3.2 U1.42 | length 3337.9
  Top Layer w6: R6.2 1905,225 1918.58,238.58 SW3.1 ; U1.42 2100,590.38 2133,623.38 2534.42,623.38 2694.85,462.94 3633.06,462.94 3650,446 3650,350 J15.12
  Bottom Layer w6: U1.42 2043.39,576.09 1750.09,576.09 1739,565 1739,305 1751,293 1930,293 1984.42,238.58 SW3.1 SW3.2
PE12: J15.13 R5.2 SW4.1 SW4.2 U1.43 | length 4057.2
  Top Layer w6: U1.43 2147,472.49 2147,586.47 2172,611.47 2529.48,611.47 2689.92,451.04 3588.96,451.04 3600,440 J15.13 ; R5.2 2500,227 2511.58,238.58 SW4.1
  Bottom Layer w6: U1.43 2152.51,372 2067,372 2050,389 2050,539.19 2025,564.19 1759.09,564.19 1750.91,556 1750.91,314 1760,304.91 2494.09,304.91 2560.42,238.58 SW4.1 SW4.2
PE13: J15.14 R1.2 U1.44 | length 7154.9
  Top Layer w6: U1.44 2200,579.57 2220,599.57 2524.55,599.57 2684.99,439.13 3541.87,439.13 3556,425 3556,344 J15.14 3652,248 4227.3,248 4260.86,281.55 4260.86,994.14 4248,1007 3867,1007 3849,1025 3849,1317 3874,1342 4321.33,1342 4329.19,1349.86 4329.19,2193.67 4266.67,2256.19 2763.51,2256.19 2565.79,2453.91 2433,2453.91 2428.74,2458.17 R1.2
PE14: J15.15 R10.2 U1.45 | length 6880.3
  Top Layer w6: U1.45 2248,471.49 2248,566.66 2269,587.66 2519.62,587.66 2680.05,427.23 3390.77,427.23 3418,400 J15.15 3500,399.62 3544,355.62 3544,284 3591.91,236.09 4232.24,236.09 4272.76,276.62 4272.76,999.07 4252.93,1018.91 4231.93,1018.91 3962.09,1018.91 3945.09,1035.91 3945.09,1309.09 3966,1330 4326.16,1330 4341.09,1344.93 4341.09,2198.6 4271.6,2268.09 2866,2268.09 2768.44,2268.09 2678.74,2357.79 R10.2
PE15: J15.16 R11.2 U1.46 | length 6474.9
  Top Layer w6: U1.46 2300,567.76 2308,575.76 2514.69,575.76 2675.12,415.32 3384.68,415.32 J15.16 3575.81,224.19 4237.17,224.19 4284.67,271.69 4284.67,983 4284.67,1004 4257.86,1030.81 4236.86,1030.81 3976.19,1030.81 3957,1050 3957,1297 3974.91,1314.91 4327.91,1314.91 4353,1340 4353,2203.53 4276.53,2280 2939,2280 2928.74,2290.26 R11.2
PIN19: J3.2 U1.19 | length 2534.6
  Top Layer w6: v1(2124,1799) 2420,1799 2444.48,1774.52 J3.2
  Bottom Layer w6: U1.19 818,1075 805,1088 805,1508 821,1524 1085.84,1524 1360.84,1799 v1(2124,1799)
PIN49: J5.2 U1.49 | length 1014.1
  Bottom Layer w6: J5.2 2496,1323.48 2496,1145 2453,1102 2453,466.48 U1.49
PIN73: J6.2 U1.73 | length 1530.8
  Bottom Layer w6: J6.2 2295.91,1323.57 2295.91,1731.11 2636.56,2071.76 2827.93,2071.76 2893.95,2005.74 2893.95,1913.43 U1.73
VCC: C9.2 C10.2 J1.1 J1.3 J1.5 J1.7 J3.1 J9.1 J9.2 J16.3 J17.3 R4.1 R5.1 R6.1 R7.1 R12.2 R14.2 R15.2 R16.2 U1.11 U1.21 U1.22 U1.28 U1.50 U1.75 U1.100 U1.101 U1.102 U2.2 | length 19019.5
  Top Layer w15: J9.1 56,1387 34.09,1365.09 34.09,356.7 335.8,55 400,55 ; R15.2 400,55 ; R14.2 500,55 ; R16.2 652,511.27 ; R12.2 700,65 690,55 500,55 ; J17.3 760,1050 835,975 U1.21 U1.22 1137.5,975 ; v1(705,1305) 865,1305 878.91,1318.91 878.91,1459.91 894,1475 U1.11 ; R4.1 800,495 783.73,511.27 652,511.27 ; U2.2 845,2583.46 825,2563.46 825,2230.51 ; U1.101 1047.5,772 1126,772 1137.5,783.5 1137.5,975 ; U1.102 1219,419.48 ; U1.100 825,2230.51 ; U1.28 1398,521.49 1398,641 ; v1(2150,785) v1(2500,785) ; J1.1 4264.01,2450.01 4276.99,2462.99 C10.2 4376.01,2462.99 4387,2452 4387,249.8 4273.55,136.35 3490.26,136.35 3343.02,283.59 3080.33,283.59 2918,121.26 R5.1 R6.1 R7.1 1236.74,121.26 1219,139 1219,419.48 ; 400,55 500,55 ; 652,511.27 652,702 J16.3 700,872 679,893 406,893 381,918 381,1361 355,1387 J9.2 233,2159 255,2181 806,2181 825,2200 825,2230.51 ; 1137.5,975 1377,975 1398,954 1398,641 ; 1219,419.48 1219,625 1235,641 1398,641
  Bottom Layer w15: J9.1 J9.2 623,1387 v1(705,1305) ; J16.3 J17.3 ; U1.22 1335,975 1525,785 v1(2150,785) ; U1.50 2499.99,1008.99 2600,1109 2600,1460 2544.48,1515.52 J3.1 2544.48,1634.52 2493,1686 2493,1873 2546,1926 2806.52,1926 U1.75 ; J1.7 J1.5 J1.3 J1.1
pads on no net: J6.3 J9.11 J9.17 J9.19 SW5.1 SW5.2 SW5.3 SW5.6 U2.4

## Keep-outs
Keep-Out Layer:
  circle w10: c100,100 r59.06
  circle w10: c3200,2650 r59.06
  circle w10: c3202.2,101.59 r59.06
  circle w10: c4500,100 r59.06
  circle w10: c4500,2650 r59.06
  circle w10: c100,2650 r59.06
  lines w10: 0,0 0,2750 4600,2750 4600,0 0,0

## Other copper
Top Layer:
  text "SCH-16042021 REV A1" at 4472.6,1003.23 h80 r90

## Silkscreen, mask and mechanical layers (free items; w line width, h text height)
Top Overlay:
  lines w9.84: 3200,100 3200,2650
  lines w10: 3200,100 4500,100 4500,2650 3200,2650
  text "3.3" at 3884.22,2579.27 h50 r270
  text "3.3" at 3984.22,2579.27 h50 r270
  text "3.3" at 4084.22,2579.27 h50 r270
  text "3.3" at 4184.22,2579.27 h50 r270
  text "5V" at 3484.32,2573.4 h50 r270
  text "5V" at 3584.32,2573.4 h50 r270
  text "5V" at 3684.32,2573.4 h50 r270
  text "5V" at 3784.32,2573.4 h50 r270
  text "GND" at 3484.01,2284.95 h50 r270
  text "GND" at 3584.01,2284.95 h50 r270
  text "GND" at 3684.01,2284.95 h50 r270
  text "GND" at 3784.01,2284.95 h50 r270
  text "GND" at 3884.01,2284.95 h50 r270
  text "GND" at 3984.01,2284.95 h50 r270
  text "GND" at 4084.01,2284.95 h50 r270
  text "GND" at 4184.01,2284.95 h50 r270
  text "A14" at 3483.92,2180.48 h50 r270
  text "A12" at 3583.92,2179.85 h50 r270
  text "A10" at 3684.22,2179.88 h50 r270
  text "A08" at 3784.22,2179.99 h50 r270
  text "A06" at 3884.22,2180.2 h50 r270
  text "A04" at 3984.22,2180.48 h50 r270
  text "A02" at 4084.22,2179.85 h50 r270
  text "A00" at 4184.22,2179.88 h50 r270
  text "A15" at 3484.22,1880.32 h50 r270
  text "A13" at 3584.22,1880.02 h50 r270
  text "A09" at 3784.22,1879.95 h50 r270
  text "A07" at 3884.22,1879.99 h50 r270
  text "A05" at 3984.22,1880.32 h50 r270
  text "A03" at 4084.22,1880.02 h50 r270
  text "A11" at 3683.92,1877.34 h50 r270
  text "A01" at 4184.22,1877.34 h50 r270
  text "B14" at 3483.92,1768.83 h50 r270
  text "B06" at 3884.22,1768.55 h50 r270
  text "B04" at 3984.22,1768.83 h50 r270
  text "B12" at 3583.92,1768.21 h50 r270
  text "B10" at 3684.22,1768.23 h50 r270
  text "B08" at 3784.22,1768.35 h50 r270
  text "B02" at 4084.22,1768.21 h50 r270
  text "B00" at 4184.22,1768.23 h50 r270
  text "B15" at 3484.22,1468.67 h50 r270
  text "B05" at 3984.22,1468.67 h50 r270
  text "B13" at 3584.22,1468.37 h50 r270
  text "B09" at 3784.22,1468.3 h50 r270
  text "B07" at 3884.22,1468.35 h50 r270
  text "B03" at 4084.22,1468.37 h50 r270
  text "B11" at 3683.92,1465.69 h50 r270
  text "B01" at 4184.22,1465.69 h50 r270
  text "C14" at 3483.99,1359.41 h50 r270
  text "C12" at 3583.99,1358.79 h50 r270
  text "C10" at 3684.01,1358.81 h50 r270
  text "C08" at 3784.01,1358.93 h50 r270
  text "C06" at 3884.01,1359.14 h50 r270
  text "C04" at 3984.01,1359.41 h50 r270
  text "C02" at 4084.01,1358.79 h50 r270
  text "C00" at 4184.01,1358.81 h50 r270
  text "C15" at 3484.01,1059.25 h50 r270
  text "C13" at 3584.01,1058.95 h50 r270
  text "C09" at 3784.01,1058.88 h50 r270
  text "C07" at 3884.01,1058.93 h50 r270
  text "C05" at 3984.01,1059.25 h50 r270
  text "C03" at 4084.01,1058.95 h50 r270
  text "C11" at 3683.99,1056.27 h50 r270
  text "C01" at 4184.01,1056.27 h50 r270
  text "D14" at 3483.92,948.84 h50 r270
  text "D06" at 3884.22,948.56 h50 r270
  text "D04" at 3984.22,948.84 h50 r270
  text "D12" at 3583.92,948.21 h50 r270
  text "D10" at 3684.22,948.24 h50 r270
  text "D08" at 3784.22,948.35 h50 r270
  text "D02" at 4084.22,948.21 h50 r270
  text "D00" at 4184.22,948.24 h50 r270
  text "D15" at 3484.22,648.68 h50 r270
  text "D05" at 3984.22,648.68 h50 r270
  text "D13" at 3584.22,648.37 h50 r270
  text "D09" at 3784.22,648.31 h50 r270
  text "D07" at 3884.22,648.35 h50 r270
  text "D03" at 4084.22,648.37 h50 r270
  text "D11" at 3683.92,645.7 h50 r270
  text "D01" at 4184.22,645.7 h50 r270
  text "E14" at 3483.92,537.61 h50 r270
  text "E04" at 3984.22,537.61 h50 r270
  text "E12" at 3583.92,536.98 h50 r270
  text "E10" at 3684.22,537.01 h50 r270
  text "E08" at 3784.22,537.12 h50 r270
  text "E06" at 3884.22,537.33 h50 r270
  text "E02" at 4084.22,536.98 h50 r270
  text "E00" at 4184.22,537.01 h50 r270
  text "E15" at 3484.22,237.44 h50 r270
  text "E13" at 3584.22,237.14 h50 r270
  text "E09" at 3784.22,237.08 h50 r270
  text "E07" at 3884.22,237.12 h50 r270
  text "E05" at 3984.22,237.44 h50 r270
  text "E03" at 4084.22,237.14 h50 r270
  text "E11" at 3683.92,234.47 h50 r270
  text "E01" at 4184.22,234.47 h50 r270